# Altium PCB PMM_MSPC_22A.PcbDoc (part 4 of 5)
Units mm, origin at the board's own origin, x right, y up, seen from the top; angles counter-clockwise.
Board outline 86.91 x 61.9 mm, 4 copper layers (Top Layer, GroundPlane, MidLayer1, Bottom Layer); 159 components, 129 nets, 534 pads, 221 vias.
Unrouted connection lines stored in the file: 40.
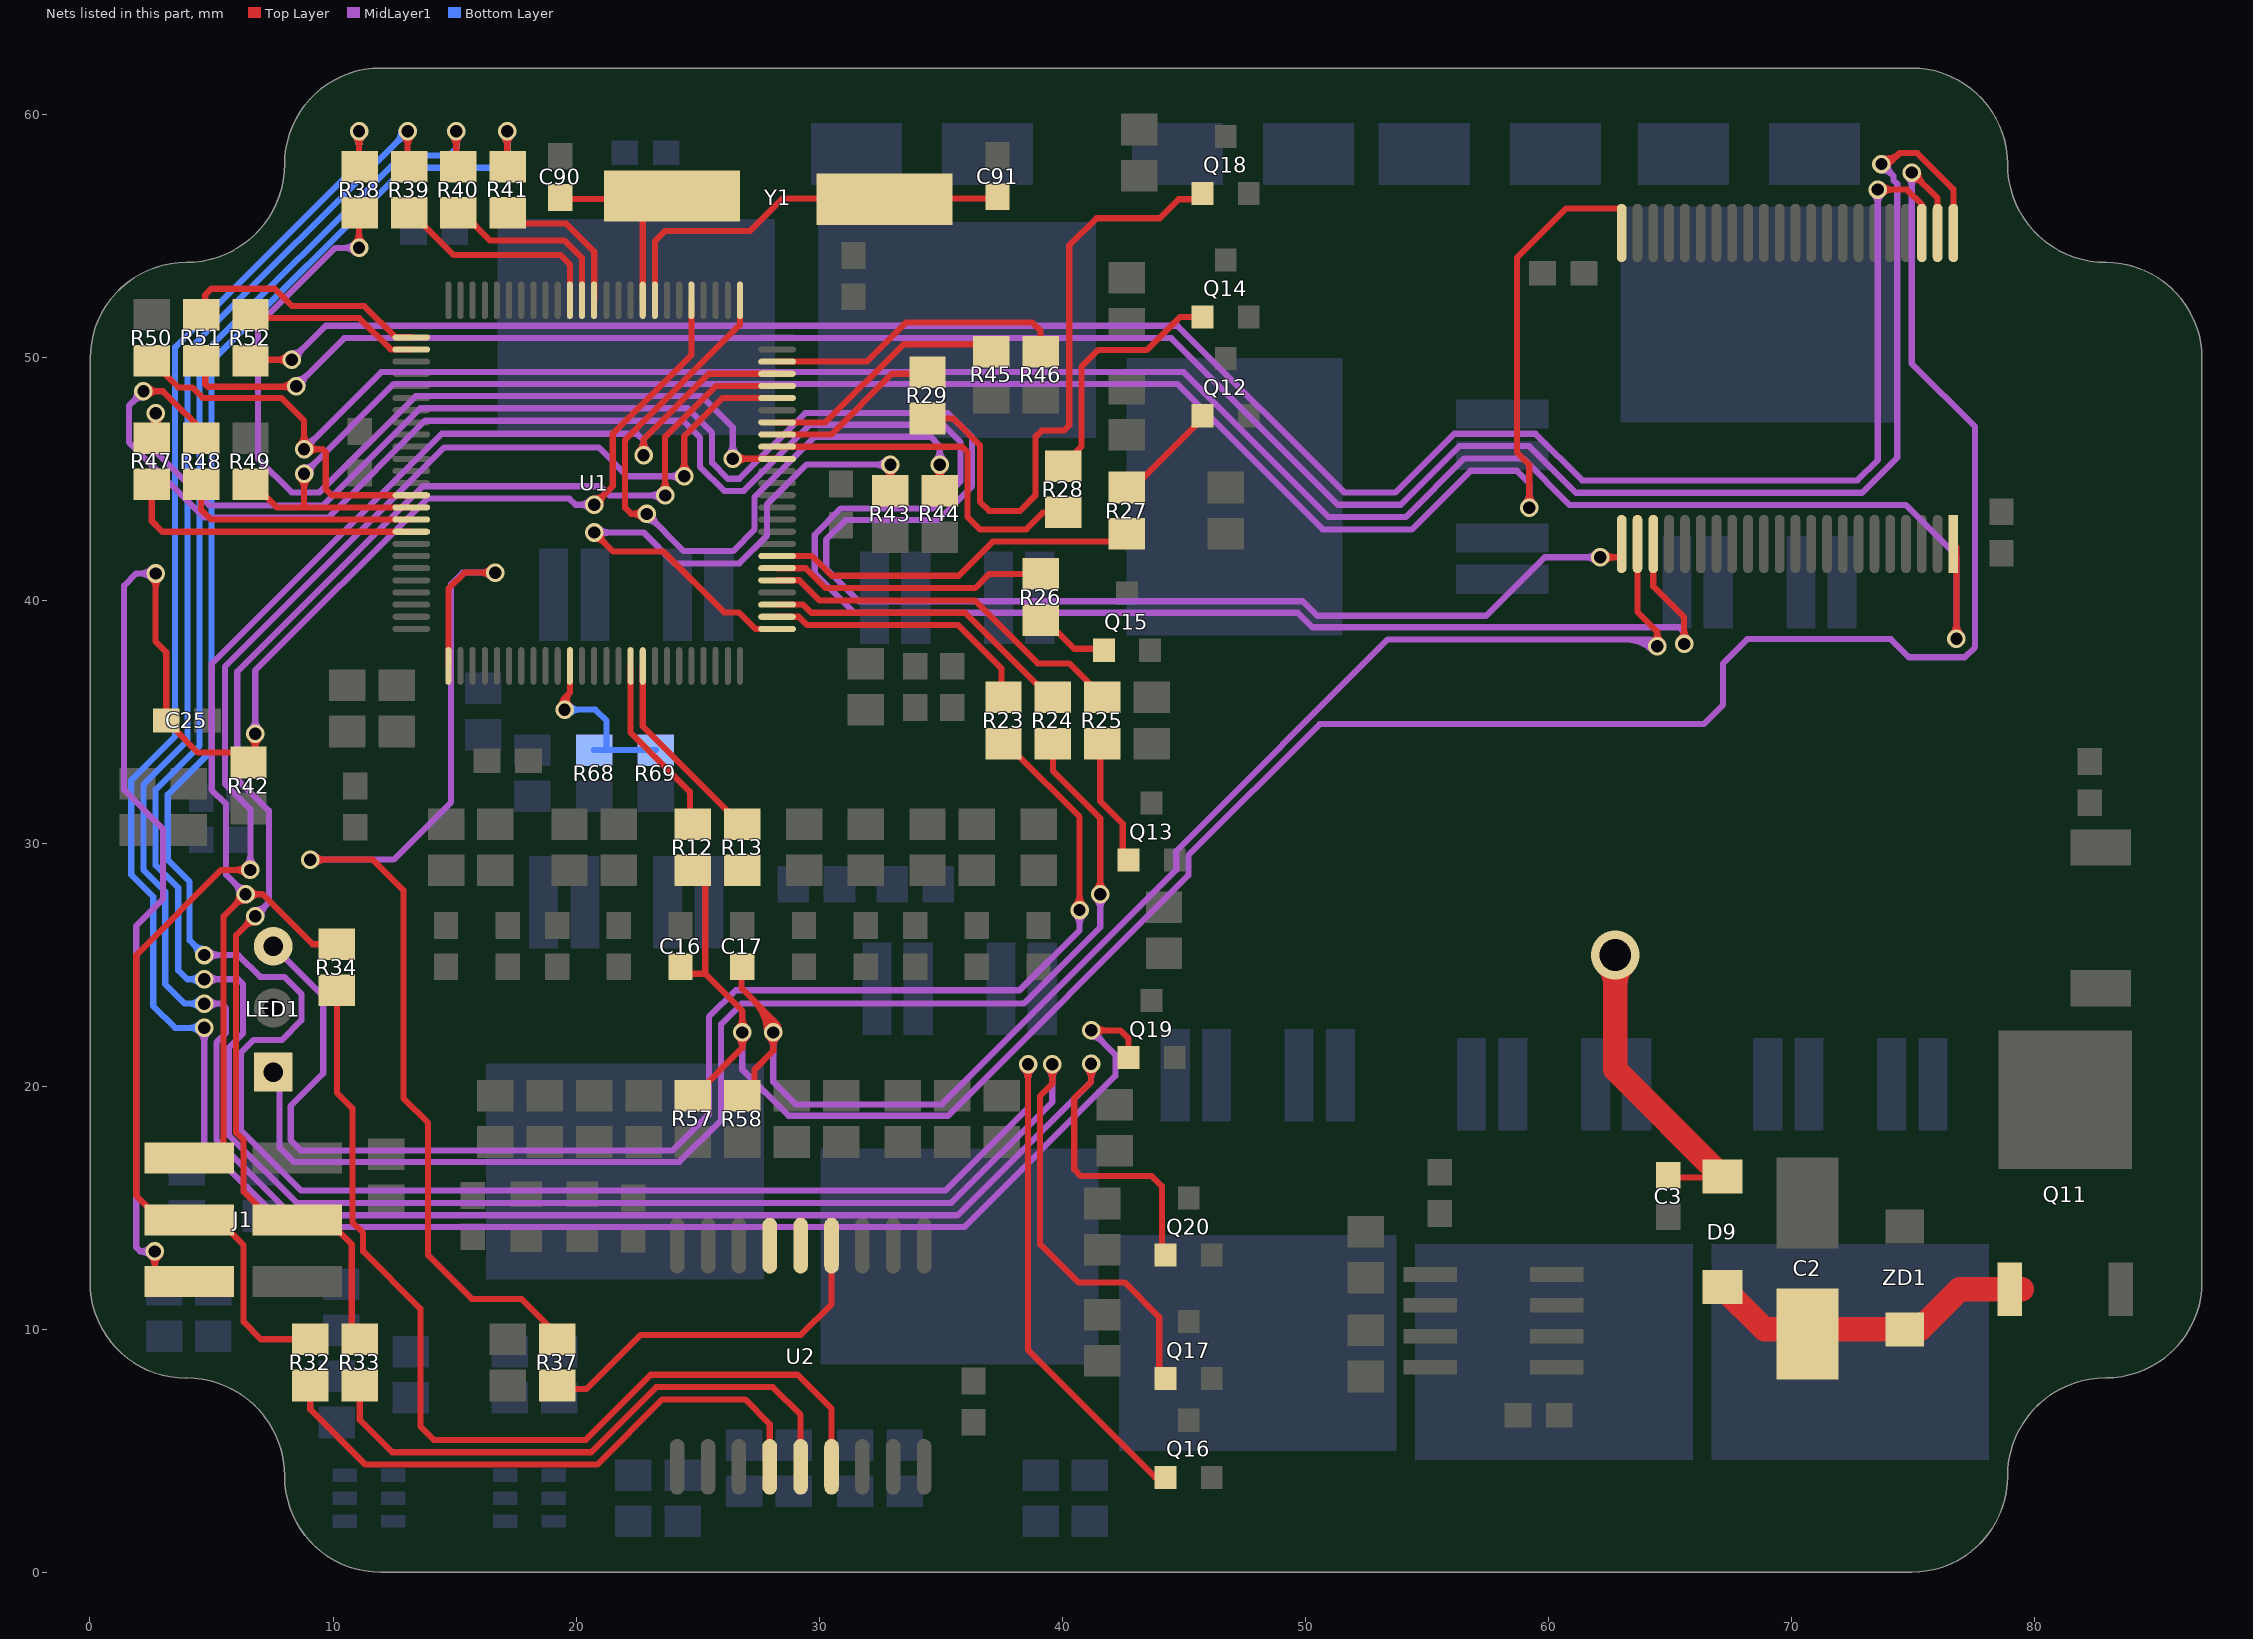
[diagram p6: the nets of this part, all layers, seen from the top]

## Via types
v1: diameter 0.762, hole 0.508, Top Layer to Bottom Layer, 138 vias
v2: diameter 2, hole 1.3, Top Layer to Bottom Layer, 26 vias
v3: diameter 1.27, hole 0.711, Top Layer to Bottom Layer, tented top, 23 vias
v4: diameter 0.762, hole 0.508, Top Layer to Bottom Layer, tented bottom, 21 vias
v5: diameter 1.27, hole 0.711, Top Layer to Bottom Layer, 7 vias
v6: diameter 0.762, hole 0.508, Top Layer to Bottom Layer, tented both sides, 5 vias
v7: diameter 2.6, hole 2.6, Top Layer to Bottom Layer, 1 vias

## Nets (pads, with @x,y where several pads share a name; then routed paths per layer and width w, separated by ;. In a path a pad name is that pad's centre, name@x,y a point inside that pad or via, vN(x,y) a via of type N, cw(c..) or ccw(c..) an arc to the next point about the centre after c; other vN are vias at no path point) (continued)
HL12_disable: pad.22 R47.1 R47.2 U1.67 | length 110.7
  Top Layer w0.254: v1@2.52,47.52 cw(c2.087,47.087) 2.7,47.087 cw(c3.313,47.087) v1@2.88,47.52 ; R47.1@2.54,44.77 2.54,43.26 2.981,42.819 U1.67@13.222,42.819 ; R47.2@2.7,46.8 v1(2.7,47.7) ; v1(62.149,41.771) pad.22@63.038,41.771 ; v1@62.329,41.591 cw(c62.762,41.158) 62.762,41.771 ; v1@62.329,41.591 cw(c62.762,41.158) 62.762,41.771 ; v1@62.329,41.591 cw(c62.762,41.158) 62.762,41.771 ; v1@62.329,41.591 cw(c62.762,41.158) 62.762,41.771 ; v1@62.329,41.591 cw(c62.762,41.158) 62.762,41.771 ; v1@62.329,41.951 ccw(c62.762,42.384) 62.762,41.771 ; v1@62.329,41.951 ccw(c62.762,42.384) 62.762,41.771 ; v1@62.329,41.951 ccw(c62.762,42.384) 62.762,41.771 ; v1@62.329,41.951 ccw(c62.762,42.384) 62.762,41.771 ; v1@62.329,41.951 ccw(c62.762,42.384) 62.762,41.771
  MidLayer1 w0.254: v1@2.52,47.52 cw(c2.087,47.087) 2.7,47.087 cw(c3.313,47.087) v1@2.88,47.52 ; v1(2.7,47.7) 2.7,46.1 4.9,43.9 9.6,43.9 13.6,47.9 24.6,47.9 25.6,46.9 25.6,45.648 26.248,45 26.726,45 29.426,47.7 35.301,47.7 36.3,46.701 36.3,44.7 34.9,43.3 31.1,43.3 30.3,42.5 30.3,41.3 31.639,39.961 49.9,39.961 50.503,39.359 57.451,39.359 59.863,41.771 v1(62.149,41.771) ; 61.536,41.771 cw(c61.536,41.158) v1@61.969,41.591 ; 61.536,41.771 ccw(c61.536,42.384) v1@61.969,41.951 ; 61.536,41.771 cw(c61.536,41.158) v1@61.969,41.591 ; 61.536,41.771 ccw(c61.536,42.384) v1@61.969,41.951 ; 61.536,41.771 cw(c61.536,41.158) v1@61.969,41.591 ; 61.536,41.771 ccw(c61.536,42.384) v1@61.969,41.951 ; 61.536,41.771 cw(c61.536,41.158) v1@61.969,41.591 ; 61.536,41.771 ccw(c61.536,42.384) v1@61.969,41.951 ; 61.536,41.771 cw(c61.536,41.158) v1@61.969,41.591 ; 61.536,41.771 ccw(c61.536,42.384) v1@61.969,41.951
HL12_enable: pad.20 R48.1 R48.2 U1.66 | length 112.5
  Top Layer w0.254: v1(2.2,48.6) 3,48.6 R48.2@4.9,46.7 ; v1@2.38,48.42 cw(c2.813,47.987) 2.813,48.6 cw(c2.813,49.213) v1@2.38,48.78 ; R48.1@4.572,44.77 4.572,43.728 4.981,43.319 U1.66@13.222,43.319 ; pad.20@64.33,42.314 64.33,40.57 65.6,39.3 v6(65.6,38.2) ; v6@65.42,38.38 ccw(c64.987,38.813) 65.6,38.813 ccw(c66.213,38.813) v6@65.78,38.38
  MidLayer1 w0.254: v1@1.946,48.6 cw(c1.333,48.6) 1.766,48.166 cw(c2.2,47.733) v1@2.2,48.346 ; v1(2.2,48.6) 1.6,48 1.6,46.496 4.696,43.4 9.8,43.4 13.785,47.385 24.415,47.385 25.1,46.7 25.1,45.5 26.1,44.5 26.9,44.5 29.624,47.224 35.104,47.224 35.824,46.504 35.824,44.897 34.703,43.776 30.903,43.776 29.824,42.697 29.824,41.103 31.441,39.485 49.703,39.485 50.303,38.885 65.415,38.885 65.6,38.7 ; v6@65.45,38.405 ccw(c65.235,38.7) 65.6,38.7 ; 65.451,38.849 cw(c65.009,38.406) v6(65.6,38.2) 65.6,38.7 ; v6@65.75,38.405 cw(c65.965,38.7) 65.6,38.7
HL12_feedback: C17.1 pad.21 R13.1 R13.2 R58.1 U1.92 | length 96.7
  Top Layer w0.254: U1.92@22.747,37.294 22.747,34.818 R13.1@26.589,30.976 ; C17.1@26.811,25.035 26.811,24.023 28.113,22.721 ; R58.1@27.351,19.546 27.351,20.689 28.113,21.451 28.113,22.721 ; pad.21@63.68,42.314 63.68,39.52 64.5,38.7 ; v6@64.323,38.282 ccw(c63.918,38.7) 64.5,38.7 ; v6(64.5,38.1) 64.5,38.7 ; v6@64.677,38.282 cw(c65.082,38.7) 64.5,38.7 ; 27.32,23.514 cw(c26.019,22.213) v1@27.859,22.213 ; 27.32,23.514 cw(c26.019,22.213) v1@27.859,22.213 ; 27.32,23.514 cw(c26.019,22.213) v1@27.859,22.213 ; 27.32,23.514 cw(c26.019,22.213) v1@27.859,22.213 ; 27.32,23.514 cw(c26.019,22.213) v1@27.859,22.213 ; 27.754,23.08 cw(c26.887,22.213) v1(28.113,22.213) ; 27.754,23.08 cw(c26.887,22.213) v1(28.113,22.213) ; 27.754,23.08 cw(c26.887,22.213) v1(28.113,22.213) ; 27.754,23.08 cw(c26.887,22.213) v1(28.113,22.213) ; 27.754,23.08 cw(c26.887,22.213) v1(28.113,22.213) ; v1@27.933,22.033 cw(c27.5,21.6) 28.113,21.6 ; v1@27.933,22.033 cw(c27.5,21.6) 28.113,21.6 ; v1@27.933,22.033 cw(c27.5,21.6) 28.113,21.6 ; v1@27.933,22.033 cw(c27.5,21.6) 28.113,21.6 ; v1@27.933,22.033 cw(c27.5,21.6) 28.113,21.6 ; v1@27.961,22.416 ccw(c27.732,22.721) 28.113,22.721 ; v1@27.961,22.416 ccw(c27.732,22.721) 28.113,22.721 ; v1@27.961,22.416 ccw(c27.732,22.721) 28.113,22.721 ; v1@27.961,22.416 ccw(c27.732,22.721) 28.113,22.721 ; v1@27.961,22.416 ccw(c27.732,22.721) 28.113,22.721 ; 28.113,21.6 cw(c28.726,21.6) v1@28.293,22.033 ; 28.113,21.6 cw(c28.726,21.6) v1@28.293,22.033 ; 28.113,21.6 cw(c28.726,21.6) v1@28.293,22.033 ; 28.113,21.6 cw(c28.726,21.6) v1@28.293,22.033 ; 28.113,21.6 cw(c28.726,21.6) v1@28.293,22.033 ; 28.113,22.721 ccw(c28.494,22.721) v1@28.265,22.416 ; 28.113,22.721 ccw(c28.494,22.721) v1@28.265,22.416 ; 28.113,22.721 ccw(c28.494,22.721) v1@28.265,22.416 ; 28.113,22.721 ccw(c28.494,22.721) v1@28.265,22.416 ; 28.113,22.721 ccw(c28.494,22.721) v1@28.265,22.416 ; 28.187,22.647 cw(c27.754,22.213) v1@28.367,22.213 ; 28.187,22.647 cw(c27.754,22.213) v1@28.367,22.213 ; 28.187,22.647 cw(c27.754,22.213) v1@28.367,22.213 ; 28.187,22.647 cw(c27.754,22.213) v1@28.367,22.213 ; 28.187,22.647 cw(c27.754,22.213) v1@28.367,22.213
  MidLayer1 w0.254: v1(28.113,22.213) 28.113,20.181 29.042,19.252 35.052,19.252 44.7,28.9 44.7,29.674 53.411,38.385 64.215,38.385 v6(64.5,38.1) ccw(c63.812,37.412) 63.812,38.385 ; 63.199,38.385 cw(c63.199,36.799) v6@64.32,37.92 ; v1@27.933,22.033 cw(c27.5,21.6) 28.113,21.6 ; v1@27.933,22.033 cw(c27.5,21.6) 28.113,21.6 ; v1@27.933,22.033 cw(c27.5,21.6) 28.113,21.6 ; v1@27.933,22.033 cw(c27.5,21.6) 28.113,21.6 ; v1@27.933,22.033 cw(c27.5,21.6) 28.113,21.6 ; 28.113,21.6 cw(c28.726,21.6) v1@28.293,22.033 ; 28.113,21.6 cw(c28.726,21.6) v1@28.293,22.033 ; 28.113,21.6 cw(c28.726,21.6) v1@28.293,22.033 ; 28.113,21.6 cw(c28.726,21.6) v1@28.293,22.033 ; 28.113,21.6 cw(c28.726,21.6) v1@28.293,22.033
HL12_status: pad.23 R49.1 U1.65 | length 99.7
  Top Layer w0.254: R49.1@6.8,44.7 7.681,43.819 U1.65@13.222,43.819 ; 8.809,43.819 v1(8.809,45.2) ; v4(59.228,43.803) 59.228,45.581 58.72,46.089 58.72,54.09 60.752,56.122 pad.23@63.038,56.122 ; v1@8.629,45.02 cw(c8.196,44.587) 8.809,44.587 ; v1@8.629,45.02 cw(c8.196,44.587) 8.809,44.587 ; v1@8.629,45.02 cw(c8.196,44.587) 8.809,44.587 ; v1@8.629,45.02 cw(c8.196,44.587) 8.809,44.587 ; v1@8.629,45.02 cw(c8.196,44.587) 8.809,44.587 ; 8.809,44.587 cw(c9.422,44.587) v1@8.989,45.02 ; 8.809,44.587 cw(c9.422,44.587) v1@8.989,45.02 ; 8.809,44.587 cw(c9.422,44.587) v1@8.989,45.02 ; 8.809,44.587 cw(c9.422,44.587) v1@8.989,45.02 ; 8.809,44.587 cw(c9.422,44.587) v1@8.989,45.02 ; v4@59.048,43.983 ccw(c58.615,44.416) 59.228,44.416 ; v4@59.048,43.983 ccw(c58.615,44.416) 59.228,44.416 ; v4@59.048,43.983 ccw(c58.615,44.416) 59.228,44.416 ; v4@59.048,43.983 ccw(c58.615,44.416) 59.228,44.416 ; v4@59.048,43.983 ccw(c58.615,44.416) 59.228,44.416 ; 59.228,44.416 ccw(c59.841,44.416) v4@59.408,43.983 ; 59.228,44.416 ccw(c59.841,44.416) v4@59.408,43.983 ; 59.228,44.416 ccw(c59.841,44.416) v4@59.408,43.983 ; 59.228,44.416 ccw(c59.841,44.416) v4@59.408,43.983 ; 59.228,44.416 ccw(c59.841,44.416) v4@59.408,43.983
  MidLayer1 w0.254: v1(8.809,45.2) 12.509,48.9 44.733,48.9 50.719,42.914 54.402,42.914 56.815,45.327 58.72,45.327 59.228,44.819 v4(59.228,43.803) ; v1@8.809,45.454 ccw(c8.809,46.067) 9.243,45.634 ; v1@8.809,45.454 ccw(c8.809,46.067) 9.243,45.634 ; v1@8.809,45.454 ccw(c8.809,46.067) 9.243,45.634 ; v1@8.809,45.454 ccw(c8.809,46.067) 9.243,45.634 ; v1@8.809,45.454 ccw(c8.809,46.067) 9.243,45.634 ; v1@9.063,45.2 cw(c9.676,45.2) 9.243,45.634 ; v1@9.063,45.2 cw(c9.676,45.2) 9.243,45.634 ; v1@9.063,45.2 cw(c9.676,45.2) 9.243,45.634 ; v1@9.063,45.2 cw(c9.676,45.2) 9.243,45.634 ; v1@9.063,45.2 cw(c9.676,45.2) 9.243,45.634 ; v4@59.048,43.983 ccw(c58.615,44.416) 59.228,44.416 ; v4@59.048,43.983 ccw(c58.615,44.416) 59.228,44.416 ; v4@59.048,43.983 ccw(c58.615,44.416) 59.228,44.416 ; v4@59.048,43.983 ccw(c58.615,44.416) 59.228,44.416 ; v4@59.048,43.983 ccw(c58.615,44.416) 59.228,44.416 ; 59.228,44.416 ccw(c59.841,44.416) v4@59.408,43.983 ; 59.228,44.416 ccw(c59.841,44.416) v4@59.408,43.983 ; 59.228,44.416 ccw(c59.841,44.416) v4@59.408,43.983 ; 59.228,44.416 ccw(c59.841,44.416) v4@59.408,43.983 ; 59.228,44.416 ccw(c59.841,44.416) v4@59.408,43.983
HL34_disable: pad.44 R51.1 R51.2 U1.51 | length 119.3
  Top Layer w0.254: R51.1@4.745,49.711 4.745,48.883 4.843,48.785 v1@8.457,48.785 ; R51.2@4.745,51.611 4.745,52.566 4.999,52.82 7.602,52.82 8.317,52.106 11.294,52.106 12.581,50.819 U1.51@13.222,50.819 ; 7.808,48.785 ccw(c7.808,49.484) v1@8.302,48.99 ; 7.929,48.785 cw(c7.929,48.257) v1@8.302,48.63 ; v1@73.752,57.923 cw(c74.17,57.518) 74.17,58.1 ; pad.44@76.68,55.114 76.68,56.916 75.196,58.4 74.47,58.4 ; v1(73.72,57.95) ccw(c73.82,58.397) 74.143,58.073 ; v1(73.72,57.95) ccw(c73.82,58.397) 74.143,58.073 ; v1(73.72,57.95) ccw(c73.82,58.397) 74.143,58.073 ; v1(73.72,57.95) ccw(c73.82,58.397) 74.143,58.073 ; v1(73.72,57.95) 74.17,58.1 ; v1@73.775,58.198 ccw(c73.939,58.931) 74.47,58.4 ; v1@73.775,58.198 ccw(c73.939,58.931) 74.47,58.4 ; v1@73.775,58.198 ccw(c73.939,58.931) 74.47,58.4 ; v1@73.775,58.198 ccw(c73.939,58.931) 74.47,58.4 ; v1@73.876,58.15 ccw(c74.07,58.4) 74.17,58.1 ; v1@73.876,58.15 ccw(c74.07,58.4) 74.17,58.1 ; v1@73.876,58.15 ccw(c74.07,58.4) 74.17,58.1 ; v1@73.876,58.15 ccw(c74.07,58.4) 74.17,58.1 ; v1@73.965,57.883 cw(c74.27,57.8) 74.17,58.1 ; v1@73.965,57.883 cw(c74.27,57.8) 74.17,58.1 ; v1@73.965,57.883 cw(c74.27,57.8) 74.17,58.1 ; v1@73.965,57.883 cw(c74.27,57.8) 74.17,58.1 ; 74.17,58.1 74.47,58.4
  MidLayer1 w0.254: v1(8.482,48.81) 10.46,50.788 44.496,50.788 51.354,43.93 53.938,43.93 56.351,46.343 59.228,46.343 61.147,44.424 72.924,44.424 74.37,45.87 74.37,57.13 74.211,57.289 74.211,57.459 v1(73.72,57.95) ; v1@8.482,49.064 ccw(c8.482,49.677) 8.916,49.244 ccw(c9.349,48.81) v1@8.736,48.81 ; v1@73.57,57.846 cw(c73.57,57.233) 74.004,57.666 cw(c74.437,58.1) v1@73.824,58.1 ; v1@73.72,57.696 cw(c73.72,57.083) 74.154,57.516 ; v1@73.72,57.696 cw(c73.72,57.083) 74.154,57.516 ; v1@73.72,57.696 cw(c73.72,57.083) 74.154,57.516 ; v1@73.72,57.696 cw(c73.72,57.083) 74.154,57.516 ; v1@73.974,57.95 ccw(c74.587,57.95) 74.154,57.516 ; v1@73.974,57.95 ccw(c74.587,57.95) 74.154,57.516 ; v1@73.974,57.95 ccw(c74.587,57.95) 74.154,57.516 ; v1@73.974,57.95 ccw(c74.587,57.95) 74.154,57.516
HL34_enable: pad.42 R52.1 R52.2 U1.52 | length 112.6
  Top Layer w0.254: R52.2@6.904,51.611 11.085,51.611 12.377,50.319 U1.52@13.222,50.319 ; R52.1@7.031,49.899 v1(8.301,49.899) ; v1(73.57,56.9) 74.77,56.9 75.38,56.29 pad.42@75.38,55.114 ; 7.688,49.899 cw(c7.688,49.286) v1@8.121,49.719 ; 7.688,49.899 ccw(c7.688,50.512) v1@8.121,50.079 ; 7.688,49.899 cw(c7.688,49.286) v1@8.121,49.719 ; 7.688,49.899 ccw(c7.688,50.512) v1@8.121,50.079 ; 7.688,49.899 cw(c7.688,49.286) v1@8.121,49.719 ; 7.688,49.899 ccw(c7.688,50.512) v1@8.121,50.079 ; 7.688,49.899 cw(c7.688,49.286) v1@8.121,49.719 ; 7.688,49.899 ccw(c7.688,50.512) v1@8.121,50.079 ; 7.688,49.899 cw(c7.688,49.286) v1@8.121,49.719 ; 7.688,49.899 ccw(c7.688,50.512) v1@8.121,50.079 ; v1@73.75,56.72 cw(c74.183,56.287) 74.183,56.9 ; v1@73.75,56.72 cw(c74.183,56.287) 74.183,56.9 ; v1@73.75,56.72 cw(c74.183,56.287) 74.183,56.9 ; v1@73.75,56.72 cw(c74.183,56.287) 74.183,56.9 ; v1@73.75,56.72 cw(c74.183,56.287) 74.183,56.9 ; v1@73.75,57.08 ccw(c74.183,57.513) 74.183,56.9 ; v1@73.75,57.08 ccw(c74.183,57.513) 74.183,56.9 ; v1@73.75,57.08 ccw(c74.183,57.513) 74.183,56.9 ; v1@73.75,57.08 ccw(c74.183,57.513) 74.183,56.9 ; v1@73.75,57.08 ccw(c74.183,57.513) 74.183,56.9
  MidLayer1 w0.254: v1(8.301,49.899) 9.698,51.296 44.75,51.296 51.608,44.438 53.727,44.438 56.14,46.851 59.482,46.851 61.401,44.932 72.732,44.932 73.57,45.77 v1(73.57,56.9) ; v1@8.301,50.153 ccw(c8.301,50.766) 8.735,50.333 ; v1@8.301,50.153 ccw(c8.301,50.766) 8.735,50.333 ; v1@8.301,50.153 ccw(c8.301,50.766) 8.735,50.333 ; v1@8.301,50.153 ccw(c8.301,50.766) 8.735,50.333 ; v1@8.301,50.153 ccw(c8.301,50.766) 8.735,50.333 ; v1@8.555,49.899 cw(c9.168,49.899) 8.735,50.333 ; v1@8.555,49.899 cw(c9.168,49.899) 8.735,50.333 ; v1@8.555,49.899 cw(c9.168,49.899) 8.735,50.333 ; v1@8.555,49.899 cw(c9.168,49.899) 8.735,50.333 ; v1@8.555,49.899 cw(c9.168,49.899) 8.735,50.333 ; v1@73.39,56.72 cw(c72.957,56.287) 73.57,56.287 ; v1@73.39,56.72 cw(c72.957,56.287) 73.57,56.287 ; v1@73.39,56.72 cw(c72.957,56.287) 73.57,56.287 ; v1@73.39,56.72 cw(c72.957,56.287) 73.57,56.287 ; v1@73.39,56.72 cw(c72.957,56.287) 73.57,56.287 ; 73.57,56.287 cw(c74.183,56.287) v1@73.75,56.72 ; 73.57,56.287 cw(c74.183,56.287) v1@73.75,56.72 ; 73.57,56.287 cw(c74.183,56.287) v1@73.75,56.72 ; 73.57,56.287 cw(c74.183,56.287) v1@73.75,56.72 ; 73.57,56.287 cw(c74.183,56.287) v1@73.75,56.72
HL34_feedback: C16.1 pad.43 R12.1 R12.2 R57.1 U1.91 | length 129.3
  Top Layer w0.254: U1.91@22.247,37.294 22.247,34.556 24.684,32.119 24.684,31.484 ; C16.1@24.303,24.626 25.319,24.626 ; R57.1@24.938,19.673 26.843,21.578 26.843,23.102 25.319,24.626 ; R12.2@25.319,28.944 25.319,24.626 ; v1(74.97,57.6) 76.03,56.54 pad.43@76.03,55.114 ; v1@26.663,22.033 cw(c26.23,21.6) 26.843,21.6 ; v1@26.663,22.033 cw(c26.23,21.6) 26.843,21.6 ; v1@26.663,22.033 cw(c26.23,21.6) 26.843,21.6 ; v1@26.663,22.033 cw(c26.23,21.6) 26.843,21.6 ; v1@26.663,22.033 cw(c26.23,21.6) 26.843,21.6 ; v1@26.663,22.393 ccw(c26.23,22.826) 26.843,22.826 ; v1@26.663,22.393 ccw(c26.23,22.826) 26.843,22.826 ; v1@26.663,22.393 ccw(c26.23,22.826) 26.843,22.826 ; v1@26.663,22.393 ccw(c26.23,22.826) 26.843,22.826 ; v1@26.663,22.393 ccw(c26.23,22.826) 26.843,22.826 ; 26.843,21.6 cw(c27.456,21.6) v1@27.023,22.033 ; 26.843,21.6 cw(c27.456,21.6) v1@27.023,22.033 ; 26.843,21.6 cw(c27.456,21.6) v1@27.023,22.033 ; 26.843,21.6 cw(c27.456,21.6) v1@27.023,22.033 ; 26.843,21.6 cw(c27.456,21.6) v1@27.023,22.033 ; 26.843,22.826 ccw(c27.456,22.826) v1@27.023,22.393 ; 26.843,22.826 ccw(c27.456,22.826) v1@27.023,22.393 ; 26.843,22.826 ccw(c27.456,22.826) v1@27.023,22.393 ; 26.843,22.826 ccw(c27.456,22.826) v1@27.023,22.393 ; 26.843,22.826 ccw(c27.456,22.826) v1@27.023,22.393 ; v1@74.97,57.346 cw(c74.97,56.733) 75.404,57.166 ; v1@74.97,57.346 cw(c74.97,56.733) 75.404,57.166 ; v1@74.97,57.346 cw(c74.97,56.733) 75.404,57.166 ; v1@74.97,57.346 cw(c74.97,56.733) 75.404,57.166 ; v1@74.97,57.346 cw(c74.97,56.733) 75.404,57.166 ; v1@75.224,57.6 ccw(c75.837,57.6) 75.404,57.166 ; v1@75.224,57.6 ccw(c75.837,57.6) 75.404,57.166 ; v1@75.224,57.6 ccw(c75.837,57.6) 75.404,57.166 ; v1@75.224,57.6 ccw(c75.837,57.6) 75.404,57.166 ; v1@75.224,57.6 ccw(c75.837,57.6) 75.404,57.166
  MidLayer1 w0.254: v1(26.843,22.213) 26.843,20.689 28.748,18.784 35.31,18.784 45.2,28.674 45.2,29.5 50.6,34.9 66.4,34.9 67.2,35.7 67.2,37.4 68.2,38.4 74.1,38.4 74.85,37.65 77.15,37.65 77.57,38.07 77.57,47.13 74.97,49.73 v1(74.97,57.6) ; v1@26.663,22.033 cw(c26.23,21.6) 26.843,21.6 ; v1@26.663,22.033 cw(c26.23,21.6) 26.843,21.6 ; v1@26.663,22.033 cw(c26.23,21.6) 26.843,21.6 ; v1@26.663,22.033 cw(c26.23,21.6) 26.843,21.6 ; v1@26.663,22.033 cw(c26.23,21.6) 26.843,21.6 ; 26.843,21.6 cw(c27.456,21.6) v1@27.023,22.033 ; 26.843,21.6 cw(c27.456,21.6) v1@27.023,22.033 ; 26.843,21.6 cw(c27.456,21.6) v1@27.023,22.033 ; 26.843,21.6 cw(c27.456,21.6) v1@27.023,22.033 ; 26.843,21.6 cw(c27.456,21.6) v1@27.023,22.033 ; v1@74.79,57.42 cw(c74.357,56.987) 74.97,56.987 ; v1@74.79,57.42 cw(c74.357,56.987) 74.97,56.987 ; v1@74.79,57.42 cw(c74.357,56.987) 74.97,56.987 ; v1@74.79,57.42 cw(c74.357,56.987) 74.97,56.987 ; v1@74.79,57.42 cw(c74.357,56.987) 74.97,56.987 ; 74.97,56.987 cw(c75.583,56.987) v1@75.15,57.42 ; 74.97,56.987 cw(c75.583,56.987) v1@75.15,57.42 ; 74.97,56.987 cw(c75.583,56.987) v1@75.15,57.42 ; 74.97,56.987 cw(c75.583,56.987) v1@75.15,57.42 ; 74.97,56.987 cw(c75.583,56.987) v1@75.15,57.42
HL34_status: pad.1 R50.1 U1.64 | length 114.9
  Top Layer w0.254: R50.1@2.54,49.85 3.63,48.76 4.2,48.76 4.635,48.325 7.871,48.325 8.809,47.387 v1(8.809,46.216) ; v1@8.629,46.396 ccw(c8.196,46.829) 8.809,46.829 ccw(c9.422,46.829) v1@8.989,46.396 ; 9.571,46.216 9.698,46.089 9.698,44.565 9.944,44.319 U1.64@13.222,44.319 ; pad.1@76.68,42.314 76.807,42.187 v1(76.807,38.416) ; v1@8.989,46.036 cw(c9.422,45.603) 9.422,46.216 ; v1@8.989,46.036 cw(c9.422,45.603) 9.422,46.216 ; v1@8.989,46.036 cw(c9.422,45.603) 9.422,46.216 ; v1@8.989,46.036 cw(c9.422,45.603) 9.422,46.216 ; v1@8.989,46.396 ccw(c9.422,46.829) 9.422,46.216 ; v1@8.989,46.396 ccw(c9.422,46.829) 9.422,46.216 ; v1@8.989,46.396 ccw(c9.422,46.829) 9.422,46.216 ; v1@8.989,46.396 ccw(c9.422,46.829) 9.422,46.216 ; v1@76.627,38.596 ccw(c76.193,39.03) 76.807,39.03 ; v1@76.627,38.596 ccw(c76.193,39.03) 76.807,39.03 ; v1@76.627,38.596 ccw(c76.193,39.03) 76.807,39.03 ; v1@76.627,38.596 ccw(c76.193,39.03) 76.807,39.03 ; v1@76.627,38.596 ccw(c76.193,39.03) 76.807,39.03 ; 76.807,39.03 ccw(c77.42,39.03) v1@76.986,38.596 ; 76.807,39.03 ccw(c77.42,39.03) v1@76.986,38.596 ; 76.807,39.03 ccw(c77.42,39.03) v1@76.986,38.596 ; 76.807,39.03 ccw(c77.42,39.03) v1@76.986,38.596 ; 76.807,39.03 ccw(c77.42,39.03) v1@76.986,38.596
  MidLayer1 w0.254: v1(8.809,46.216) 11.978,49.385 45.01,49.385 50.973,43.422 54.148,43.422 56.561,45.835 58.974,45.835 60.893,43.916 74.736,43.916 76.807,41.845 v1(76.807,38.416) ; v1@8.809,46.47 ccw(c8.809,47.083) 9.243,46.65 ; v1@8.809,46.47 ccw(c8.809,47.083) 9.243,46.65 ; v1@8.809,46.47 ccw(c8.809,47.083) 9.243,46.65 ; v1@8.809,46.47 ccw(c8.809,47.083) 9.243,46.65 ; v1@8.809,46.47 ccw(c8.809,47.083) 9.243,46.65 ; v1@9.063,46.216 cw(c9.676,46.216) 9.243,46.65 ; v1@9.063,46.216 cw(c9.676,46.216) 9.243,46.65 ; v1@9.063,46.216 cw(c9.676,46.216) 9.243,46.65 ; v1@9.063,46.216 cw(c9.676,46.216) 9.243,46.65 ; v1@9.063,46.216 cw(c9.676,46.216) 9.243,46.65 ; v1@76.627,38.596 ccw(c76.193,39.03) 76.807,39.03 ; v1@76.627,38.596 ccw(c76.193,39.03) 76.807,39.03 ; v1@76.627,38.596 ccw(c76.193,39.03) 76.807,39.03 ; v1@76.627,38.596 ccw(c76.193,39.03) 76.807,39.03 ; v1@76.627,38.596 ccw(c76.193,39.03) 76.807,39.03 ; 76.807,39.03 ccw(c77.42,39.03) v1@76.986,38.596 ; 76.807,39.03 ccw(c77.42,39.03) v1@76.986,38.596 ; 76.807,39.03 ccw(c77.42,39.03) v1@76.986,38.596 ; 76.807,39.03 ccw(c77.42,39.03) v1@76.986,38.596 ; 76.807,39.03 ccw(c77.42,39.03) v1@76.986,38.596
IGN_SIG: C2.1 C3.2 D9.1 D9.2 Q11.1 ZD1.2 | length 28.5
  Top Layer w0.254: C3.2@65.07,16.244 D9.1@67.037,16.244
  Top Layer w1: v2@62.416,25.046 cw(c61.563,24.193) 62.77,24.193 cw(c63.977,24.193) v2@63.124,25.046 ; v2(62.77,25.4) 62.77,20.687 D9.1@67.175,16.282 ; D9.2@67.175,11.732 68.907,10 75.3,10 76.948,11.648 79.503,11.648
LEDamber: LED1.3 R23.1 R23.2 U1.2 | length 76.1
  Top Layer w0.254: U1.2@28.272,39.319 29.168,39.319 29.51,38.977 35.723,38.977 37.511,37.189 R23.2@37.511,36.371 ; R23.1@37.511,34.471 38.041,33.941 38.041,33.759 40.72,31.08 v1(40.72,27.25) ; v1@40.54,27.43 ccw(c40.107,27.863) 40.72,27.863 ; v1@40.54,27.43 ccw(c40.107,27.863) 40.72,27.863 ; v1@40.54,27.43 ccw(c40.107,27.863) 40.72,27.863 ; v1@40.54,27.43 ccw(c40.107,27.863) 40.72,27.863 ; v1@40.54,27.43 ccw(c40.107,27.863) 40.72,27.863 ; 40.72,27.863 ccw(c41.333,27.863) v1@40.9,27.43 ; 40.72,27.863 ccw(c41.333,27.863) v1@40.9,27.43 ; 40.72,27.863 ccw(c41.333,27.863) v1@40.9,27.43 ; 40.72,27.863 ccw(c41.333,27.863) v1@40.9,27.43 ; 40.72,27.863 ccw(c41.333,27.863) v1@40.9,27.43
  MidLayer1 w0.254: LED1.3@7.539,25.76 9.6,23.699 9.6,20.53 8.26,19.19 8.26,17.786 8.696,17.35 23.97,17.35 25.47,18.85 25.47,22.85 26.57,23.95 38.25,23.95 40.72,26.42 v1(40.72,27.25) ; v1@40.54,27.07 cw(c40.107,26.637) 40.72,26.637 ; v1@40.54,27.07 cw(c40.107,26.637) 40.72,26.637 ; v1@40.54,27.07 cw(c40.107,26.637) 40.72,26.637 ; 40.72,26.637 cw(c41.333,26.637) v1@40.9,27.07 ; 40.72,26.637 cw(c41.333,26.637) v1@40.9,27.07 ; 40.72,26.637 cw(c41.333,26.637) v1@40.9,27.07
LEDgreen: LED1.1 R24.1 R24.2 U1.3 | length 74.2
  Top Layer w0.254: U1.3@28.272,39.819 29.343,39.819 29.677,39.485 36.015,39.485 39.129,36.371 R24.2@39.543,36.371 ; R24.1@39.624,34.102 39.624,32.976 41.57,31.03 v1(41.57,27.9) ; v1@41.39,28.08 ccw(c40.957,28.513) 41.57,28.513 ; v1@41.39,28.08 ccw(c40.957,28.513) 41.57,28.513 ; v1@41.39,28.08 ccw(c40.957,28.513) 41.57,28.513 ; v1@41.39,28.08 ccw(c40.957,28.513) 41.57,28.513 ; v1@41.39,28.08 ccw(c40.957,28.513) 41.57,28.513 ; 41.57,28.513 ccw(c42.183,28.513) v1@41.75,28.08 ; 41.57,28.513 ccw(c42.183,28.513) v1@41.75,28.08 ; 41.57,28.513 ccw(c42.183,28.513) v1@41.75,28.08 ; 41.57,28.513 ccw(c42.183,28.513) v1@41.75,28.08 ; 41.57,28.513 ccw(c42.183,28.513) v1@41.75,28.08
  MidLayer1 w0.254: LED1.1@7.539,20.58 7.8,20.319 7.8,17.47 8.385,16.885 24.255,16.885 25.97,18.6 25.97,22.55 26.82,23.4 38.426,23.4 41.57,26.544 v1(41.57,27.9) ; v1@41.39,27.72 cw(c40.957,27.287) 41.57,27.287 ; v1@41.39,27.72 cw(c40.957,27.287) 41.57,27.287 ; v1@41.39,27.72 cw(c40.957,27.287) 41.57,27.287 ; v1@41.39,27.72 cw(c40.957,27.287) 41.57,27.287 ; v1@41.39,27.72 cw(c40.957,27.287) 41.57,27.287 ; 41.57,27.287 cw(c42.183,27.287) v1@41.75,27.72 ; 41.57,27.287 cw(c42.183,27.287) v1@41.75,27.72 ; 41.57,27.287 cw(c42.183,27.287) v1@41.75,27.72 ; 41.57,27.287 cw(c42.183,27.287) v1@41.75,27.72 ; 41.57,27.287 cw(c42.183,27.287) v1@41.75,27.72
MISO: J1.1 R34.1 R34.2 U1.22 U2.15 | length 108.7
  Top Layer w0.254: J1.1@5.5,17 5.5,27 v1(6.4,27.9) 7.1,27.9 9.158,25.842 R34.1@10.16,25.842 ; v1@6.146,27.9 cw(c5.533,27.9) 5.966,27.466 cw(c6.4,27.033) v1@6.4,27.646 ; v1@6.58,27.72 cw(c7.013,27.287) 7.013,27.9 cw(c7.013,28.513) v1@6.58,28.08 ; R34.2@10.16,23.942 10.16,19.74 10.8,19.1 10.8,14.4 11.238,13.962 11.238,13.212 13.6,10.85 13.6,6 14.151,5.449 20.398,5.449 23.077,8.128 29.117,8.128 30.514,6.731 U2.15@30.514,4.34 ; v4(22.779,45.962) 22.779,46.629 25.469,49.319 U1.22@28.272,49.319 ; v4@22.599,46.142 ccw(c22.166,46.575) 22.779,46.575 ; v4@22.599,46.142 ccw(c22.166,46.575) 22.779,46.575 ; v4@22.599,46.142 ccw(c22.166,46.575) 22.779,46.575 ; v4@22.599,46.142 ccw(c22.166,46.575) 22.779,46.575 ; v4@22.599,46.142 ccw(c22.166,46.575) 22.779,46.575 ; 22.779,46.575 ccw(c23.392,46.575) v4@22.959,46.142 ; 22.779,46.575 ccw(c23.392,46.575) v4@22.959,46.142 ; 22.779,46.575 ccw(c23.392,46.575) v4@22.959,46.142 ; 22.779,46.575 ccw(c23.392,46.575) v4@22.959,46.142 ; 22.779,46.575 ccw(c23.392,46.575) v4@22.959,46.142
  MidLayer1 w0.254: v1@6.146,27.9 ccw(c5.533,27.9) 5.966,28.334 ccw(c6.4,28.767) v1@6.4,28.154 ; v1(6.4,27.9) 5.6,28.7 5.6,31.596 5.011,32.185 5.011,37.385 14.477,46.851 22.503,46.851 22.779,46.575 ; v4(22.779,45.962) 22.779,46.575 ; v4@22.599,46.142 ccw(c22.166,46.575) 22.779,46.575 ; v4@22.599,46.142 ccw(c22.166,46.575) 22.779,46.575 ; v4@22.599,46.142 ccw(c22.166,46.575) 22.779,46.575 ; v4@22.599,46.142 ccw(c22.166,46.575) 22.779,46.575 ; v4@22.599,46.142 ccw(c22.166,46.575) 22.779,46.575 ; 22.779,46.575 ccw(c23.392,46.575) v4@22.959,46.142 ; 22.779,46.575 ccw(c23.392,46.575) v4@22.959,46.142 ; 22.779,46.575 ccw(c23.392,46.575) v4@22.959,46.142 ; 22.779,46.575 ccw(c23.392,46.575) v4@22.959,46.142 ; 22.779,46.575 ccw(c23.392,46.575) v4@22.959,46.142
MOSI: J1.4 R33.1 R33.2 U1.21 U2.14 | length 96.4
  Top Layer w0.254: v1@6.546,27 cw(c5.933,27) 6.366,26.566 cw(c6.8,26.133) v1@6.8,26.746 ; v1(6.8,27) 6.011,26.211 6.011,18.085 6.32,17.776 6.32,15.65 7.47,14.5 9.77,14.5 10.77,13.5 10.77,9.518 R33.1@10.627,9.375 ; R33.2@11.098,7.686 11.098,6.272 12.429,4.941 20.625,4.941 23.304,7.62 28.101,7.62 29.244,6.477 U2.14@29.244,4.34 ; v1(23.668,44.311) 23.668,46.724 25.763,48.819 U1.21@28.272,48.819 ; v1@23.488,44.491 ccw(c23.055,44.924) 23.668,44.924 ; v1@23.488,44.491 ccw(c23.055,44.924) 23.668,44.924 ; v1@23.488,44.491 ccw(c23.055,44.924) 23.668,44.924 ; v1@23.488,44.491 ccw(c23.055,44.924) 23.668,44.924 ; v1@23.488,44.491 ccw(c23.055,44.924) 23.668,44.924 ; 23.668,44.924 ccw(c24.281,44.924) v1@23.848,44.491 ; 23.668,44.924 ccw(c24.281,44.924) v1@23.848,44.491 ; 23.668,44.924 ccw(c24.281,44.924) v1@23.848,44.491 ; 23.668,44.924 ccw(c24.281,44.924) v1@23.848,44.491 ; 23.668,44.924 ccw(c24.281,44.924) v1@23.848,44.491
  MidLayer1 w0.254: v1(6.8,27) 7.364,27.564 7.364,31.336 6.061,32.639 6.061,37.061 13.692,44.692 21.001,44.692 21.382,44.311 v1(23.668,44.311) ; v1@6.8,27.254 ccw(c6.8,27.867) 7.234,27.434 ccw(c7.667,27) v1@7.054,27 ; 23.055,44.311 cw(c23.055,43.698) v1@23.488,44.131 ; 23.055,44.311 ccw(c23.055,44.924) v1@23.488,44.491 ; 23.055,44.311 cw(c23.055,43.698) v1@23.488,44.131 ; 23.055,44.311 ccw(c23.055,44.924) v1@23.488,44.491 ; 23.055,44.311 cw(c23.055,43.698) v1@23.488,44.131 ; 23.055,44.311 ccw(c23.055,44.924) v1@23.488,44.491 ; 23.055,44.311 cw(c23.055,43.698) v1@23.488,44.131 ; 23.055,44.311 ccw(c23.055,44.924) v1@23.488,44.491 ; 23.055,44.311 cw(c23.055,43.698) v1@23.488,44.131 ; 23.055,44.311 ccw(c23.055,44.924) v1@23.488,44.491
NewNet: 
PWM1: Q15.1 R26.1 R26.2 U1.6 | length 14.6
  Top Layer w0.254: U1.6@28.272,41.319 29.454,41.319 30.272,40.501 36.421,40.501 37.002,41.082 R26.2@38.608,41.082 ; R26.1@38.608,39.182 38.757,39.033 39.259,39.241 40.5,38 Q15.1@41.722,38
PWM2: Q12.1 R27.1 R27.2 U1.7 | length 19.7
  Top Layer w0.254: U1.7@28.272,41.819 29.716,41.819 30.526,41.009 35.749,41.009 37.15,42.41 R27.1@42.7,42.41 ; R27.2@42.672,44.638 42.938,44.638 Q12.1@45.84,47.54
PWM3: Q14.1 R28.1 R28.2 U1.16 | length 25.5
  Top Layer w0.254: U1.16@28.272,46.319 35.884,46.319 36.114,46.089 36.114,43.422 36.622,42.914 38.527,42.914 39.228,43.615 R28.1@40.051,43.615 ; R28.2@40.305,45.2 40.305,45.825 40.8,46.32 40.8,49.6 41.5,50.3 43.5,50.3 44.857,51.657 Q14.1@45.786,51.657
PWM4: Q18.1 R29.1 R29.2 U1.17 | length 32.8
  Top Layer w0.254: U1.17@28.272,46.819 30.494,46.819 32.996,49.321 R29.2@34.52,49.321 ; R29.1@34.463,47.479 35.521,47.479 36.622,46.378 36.622,44.057 37.003,43.676 38.273,43.676 38.908,44.311 38.908,46.724 39.162,46.978 40.078,46.978 40.3,47.2 40.3,54.6 41.421,55.721 44.021,55.721 44.8,56.5 Q18.1@46,56.5
PWM5: Q16.1 R41.1 R41.2 U1.38 | length 127.6
  Top Layer w0.254: v1@16.99,59.12 cw(c16.557,58.687) 17.17,58.687 cw(c17.783,58.687) v1@17.35,59.12 ; R41.2@17.17,57.87 v1(17.17,59.3) ; R41.1@17.47,55.5 19.591,55.5 20.747,54.344 U1.38@20.747,52.344 ; v1(38.6,20.9) 38.6,9.142 43.837,3.905 Q16.1@44.262,3.905 ; v1@38.42,20.72 cw(c37.987,20.287) 38.6,20.287 ; v1@38.42,20.72 cw(c37.987,20.287) 38.6,20.287 ; v1@38.42,20.72 cw(c37.987,20.287) 38.6,20.287 ; 38.6,20.287 cw(c39.213,20.287) v1@38.78,20.72 ; 38.6,20.287 cw(c39.213,20.287) v1@38.78,20.72 ; 38.6,20.287 cw(c39.213,20.287) v1@38.78,20.72
  MidLayer1 w0.254: v1(4.7,25.4) 6.1,25.4 7,24.5 8,24.5 8.7,23.8 8.7,22.713 7.887,21.9 6.726,21.9 6.2,21.374 6.2,18.196 8.692,15.704 35.193,15.704 38.6,19.111 v1(38.6,20.9) ; v1@4.88,25.22 cw(c5.313,24.787) 5.313,25.4 cw(c5.313,26.013) v1@4.88,25.58 ; v1@38.42,20.72 cw(c37.987,20.287) 38.6,20.287 ; v1@38.42,20.72 cw(c37.987,20.287) 38.6,20.287 ; v1@38.42,20.72 cw(c37.987,20.287) 38.6,20.287 ; 38.6,20.287 cw(c39.213,20.287) v1@38.78,20.72 ; 38.6,20.287 cw(c39.213,20.287) v1@38.78,20.72 ; 38.6,20.287 cw(c39.213,20.287) v1@38.78,20.72
  Bottom Layer w0.254: v1@4.446,25.4 ccw(c3.833,25.4) 4.266,25.834 ccw(c4.7,26.267) v1@4.7,25.654 ; v1(4.7,25.4) 4.1,26 4.1,28.413 3.2,29.313 3.2,32 5,33.8 5,49.83 12.97,57.8 16.87,57.8 17.17,58.1 v1(17.17,59.3) ; v1@16.99,59.12 cw(c16.557,58.687) 17.17,58.687 cw(c17.783,58.687) v1@17.35,59.12
PWM6: Q20.1 R39.1 R39.2 U1.40 | length 119.5
  Top Layer w0.254: v1@12.89,59.12 cw(c12.457,58.687) 13.07,58.687 cw(c13.683,58.687) v1@13.25,59.12 ; R39.2@13.07,57.906 v1(13.07,59.3) ; R39.1@13.47,55.7 14.97,54.2 19.367,54.2 19.747,53.82 U1.40@19.747,52.344 ; v1@41.194,20.868 41.194,20.194 40.5,19.5 40.5,16.575 40.775,16.3 43.7,16.3 44.111,15.889 Q20.1@44.111,13.185 ; v1@41.014,20.744 cw(c40.581,20.311) 41.194,20.311 ; v1@41.014,20.744 cw(c40.581,20.311) 41.194,20.311 ; v1@41.014,20.744 cw(c40.581,20.311) 41.194,20.311 ; 41.194,20.311 cw(c41.807,20.311) v1@41.374,20.744 ; 41.194,20.311 cw(c41.807,20.311) v1@41.374,20.744 ; 41.194,20.311 cw(c41.807,20.311) v1@41.374,20.744
  MidLayer1 w0.254: v1(4.7,23.4) 5.4,23.4 5.6,23.2 5.6,22.2 5.2,21.8 5.2,17.8 8.312,14.688 35.701,14.688 41.194,20.181 v1(41.194,20.924) ; v1@4.88,23.22 cw(c5.313,22.787) 5.313,23.4 cw(c5.313,24.013) v1@4.88,23.58 ; v1@41.014,20.744 cw(c40.581,20.311) 41.194,20.311 ; v1@41.014,20.744 cw(c40.581,20.311) 41.194,20.311 ; v1@41.014,20.744 cw(c40.581,20.311) 41.194,20.311 ; 41.194,20.311 cw(c41.807,20.311) v1@41.374,20.744 ; 41.194,20.311 cw(c41.807,20.311) v1@41.374,20.744 ; 41.194,20.311 cw(c41.807,20.311) v1@41.374,20.744
  Bottom Layer w0.254: v1@4.52,23.22 ccw(c4.087,22.787) 4.087,23.4 ccw(c4.087,24.013) v1@4.52,23.58 ; v1(4.7,23.4) 3.9,23.4 3.1,24.2 3.1,28 2.2,28.9 2.2,32.4 4.011,34.211 4.011,50.241 v1(13.07,59.3) ; v1@12.816,59.3 cw(c12.203,59.3) 12.636,58.866 cw(c13.07,58.433) v1@13.07,59.046
PWM7: Q19.1 R38.1 R38.2 U1.15 | length 154.2
  Top Layer w0.254: v1@10.89,59.12 cw(c10.457,58.687) 11.07,58.687 cw(c11.683,58.687) v1@11.25,59.12 ; v1(11.07,54.5) R38.1@11.07,55.918 ; R38.2@11.07,57.874 v1(11.07,59.3) ; v4(26.451,45.819) U1.15@28.272,45.819 ; v4@26.631,45.639 cw(c27.064,45.206) 27.064,45.819 cw(c27.064,46.432) v4@26.631,45.999 ; v1(41.2,22.3) 42.4,22.3 42.738,21.962 Q19.1@42.738,21.177 ; v1@10.89,54.68 ccw(c10.457,55.113) 11.07,55.113 ; v1@10.89,54.68 ccw(c10.457,55.113) 11.07,55.113 ; v1@10.89,54.68 ccw(c10.457,55.113) 11.07,55.113 ; v1@10.89,54.68 ccw(c10.457,55.113) 11.07,55.113 ; v1@10.89,54.68 ccw(c10.457,55.113) 11.07,55.113 ; 11.07,55.113 ccw(c11.683,55.113) v1@11.25,54.68 ; 11.07,55.113 ccw(c11.683,55.113) v1@11.25,54.68 ; 11.07,55.113 ccw(c11.683,55.113) v1@11.25,54.68 ; 11.07,55.113 ccw(c11.683,55.113) v1@11.25,54.68 ; 11.07,55.113 ccw(c11.683,55.113) v1@11.25,54.68 ; v1@41.38,22.12 cw(c41.813,21.687) 41.813,22.3 ; v1@41.38,22.12 cw(c41.813,21.687) 41.813,22.3 ; v1@41.38,22.12 cw(c41.813,21.687) 41.813,22.3 ; v1@41.38,22.48 ccw(c41.813,22.913) 41.813,22.3 ; v1@41.38,22.48 ccw(c41.813,22.913) 41.813,22.3 ; v1@41.38,22.48 ccw(c41.813,22.913) 41.813,22.3
  MidLayer1 w0.254: v1@4.52,22.22 cw(c4.087,21.787) 4.7,21.787 cw(c5.313,21.787) v1@4.88,22.22 ; v1(4.7,22.4) 4.7,17.6 8.088,14.212 35.987,14.212 42.2,20.425 42.2,21.3 v1(41.2,22.3) ; v1(11.07,54.5) 10.1,54.5 6.911,51.311 6.911,45.828 8.301,44.438 9.444,44.438 13.406,48.4 25.167,48.4 26.451,47.116 v4(26.451,45.819) ; v4@26.271,45.999 ccw(c25.838,46.432) 26.451,46.432 ccw(c27.064,46.432) v4@26.631,45.999 ; 10.457,54.5 cw(c10.457,53.887) v1@10.89,54.32 ; 10.457,54.5 ccw(c10.457,55.113) v1@10.89,54.68 ; 10.457,54.5 cw(c10.457,53.887) v1@10.89,54.32 ; 10.457,54.5 ccw(c10.457,55.113) v1@10.89,54.68 ; 10.457,54.5 cw(c10.457,53.887) v1@10.89,54.32 ; 10.457,54.5 ccw(c10.457,55.113) v1@10.89,54.68 ; 10.457,54.5 cw(c10.457,53.887) v1@10.89,54.32 ; 10.457,54.5 ccw(c10.457,55.113) v1@10.89,54.68 ; 10.457,54.5 cw(c10.457,53.887) v1@10.89,54.32 ; 10.457,54.5 ccw(c10.457,55.113) v1@10.89,54.68 ; v1@41.2,22.046 cw(c41.2,21.433) 41.634,21.866 ; v1@41.2,22.046 cw(c41.2,21.433) 41.634,21.866 ; v1@41.2,22.046 cw(c41.2,21.433) 41.634,21.866 ; v1@41.454,22.3 ccw(c42.067,22.3) 41.634,21.866 ; v1@41.454,22.3 ccw(c42.067,22.3) 41.634,21.866 ; v1@41.454,22.3 ccw(c42.067,22.3) 41.634,21.866
  Bottom Layer w0.254: v1@4.52,22.22 ccw(c4.087,21.787) 4.087,22.4 ccw(c4.087,23.013) v1@4.52,22.58 ; v1(4.7,22.4) 3.5,22.4 2.6,23.3 2.6,27.8 1.7,28.7 1.7,32.6 3.5,34.4 3.5,50.415 11.07,57.985 v1(11.07,59.3) ; v1@10.89,59.12 cw(c10.457,58.687) 11.07,58.687 cw(c11.683,58.687) v1@11.25,59.12
PWM8: Q17.1 R40.1 R40.2 U1.39 | length 123.5
  Top Layer w0.254: v1@14.89,59.12 cw(c14.457,58.687) 15.07,58.687 cw(c15.683,58.687) v1@15.25,59.12 ; R40.2@15.07,57.938 v1(15.07,59.3) ; R40.1@15.37,55.9 16.47,54.8 19.529,54.8 20.247,54.082 U1.39@20.247,52.344 ; v1(39.6,20.9) 39.6,20.1 39.1,19.6 39.1,13.5 40.674,11.926 42.574,11.926 44,10.5 Q17.1@44,8 ; v1@39.42,20.72 cw(c38.987,20.287) 39.6,20.287 ; v1@39.42,20.72 cw(c38.987,20.287) 39.6,20.287 ; v1@39.42,20.72 cw(c38.987,20.287) 39.6,20.287 ; 39.6,20.287 cw(c40.213,20.287) v1@39.78,20.72 ; 39.6,20.287 cw(c40.213,20.287) v1@39.78,20.72 ; 39.6,20.287 cw(c40.213,20.287) v1@39.78,20.72
  MidLayer1 w0.254: v1(4.7,24.4) 6.1,24.4 6.3,24.2 6.3,22.174 5.711,21.585 5.711,17.989 8.504,15.196 35.447,15.196 39.6,19.349 v1(39.6,20.9) ; v1@4.88,24.22 cw(c5.313,23.787) 5.313,24.4 cw(c5.313,25.013) v1@4.88,24.58 ; v1@39.42,20.72 cw(c38.987,20.287) 39.6,20.287 ; v1@39.42,20.72 cw(c38.987,20.287) 39.6,20.287 ; v1@39.42,20.72 cw(c38.987,20.287) 39.6,20.287 ; 39.6,20.287 cw(c40.213,20.287) v1@39.78,20.72 ; 39.6,20.287 cw(c40.213,20.287) v1@39.78,20.72 ; 39.6,20.287 cw(c40.213,20.287) v1@39.78,20.72
  Bottom Layer w0.254: v1@4.52,24.22 ccw(c4.087,23.787) 4.087,24.4 ccw(c4.087,25.013) v1@4.52,24.58 ; v1(4.7,24.4) 4,24.4 3.631,24.769 3.631,28.165 2.7,29.096 2.7,32.2 4.5,34 4.5,49.974 12.826,58.3 14.77,58.3 15.07,58.6 v1(15.07,59.3) ; v1@14.89,59.12 cw(c14.457,58.687) 15.07,58.687 cw(c15.683,58.687) v1@15.25,59.12
PWM9: Q13.1 R25.1 R25.2 U1.5 | length 20.8
  Top Layer w0.254: U1.5@28.272,40.819 29.192,40.819 30.018,39.993 36.407,39.993 39,37.4 40.3,37.4 41.575,36.125 R25.2@41.575,35.675 ; R25.1@41.575,33.963 41.575,31.725 42.5,30.8 42.5,29.543 Q13.1@42.738,29.305
PWM10: R46.2 U1.23 | length 12.5
  Top Layer w0.254: U1.23@28.272,49.819 31.97,49.819 33.574,51.423 38.777,51.423 39.116,51.084 R46.2@39.116,50.226
PWM11: R45.2 U1.18 | length 10.8
  Top Layer w0.254: U1.18@28.272,47.319 30.264,47.319 33.479,50.534 37.064,50.534 R45.2@37.511,50.087
PWM12: R43.2 U1.1 | length 41.8
  Top Layer w0.254: v4(20.747,42.787) 21.534,42 23.6,42 26.1,39.5 26.701,39.5 27.382,38.819 U1.1@28.272,38.819 ; R43.2@32.939,44.499 v1(32.939,45.581) ; 21.181,42.353 cw(c21.614,42.787) 21.001,42.787 ccw(c21.614,42.787) 21.181,42.353 ; 21.181,42.353 ccw(c20.747,41.92) 20.747,42.533 cw(c20.747,41.92) 21.181,42.353 ; v1@32.759,45.401 cw(c32.326,44.968) R43.2@32.939,44.968 ; v1@32.759,45.401 cw(c32.326,44.968) R43.2@32.939,44.968 ; v1@32.759,45.401 cw(c32.326,44.968) R43.2@32.939,44.968 ; v1@32.759,45.401 cw(c32.326,44.968) R43.2@32.939,44.968 ; v1@32.759,45.401 cw(c32.326,44.968) R43.2@32.939,44.968 ; R43.2@32.939,44.968 cw(c33.552,44.968) v1@33.119,45.401 ; R43.2@32.939,44.968 cw(c33.552,44.968) v1@33.119,45.401 ; R43.2@32.939,44.968 cw(c33.552,44.968) v1@33.119,45.401 ; R43.2@32.939,44.968 cw(c33.552,44.968) v1@33.119,45.401 ; R43.2@32.939,44.968 cw(c33.552,44.968) v1@33.119,45.401
  MidLayer1 w0.254: v4(20.747,42.787) 22.779,42.787 24.049,41.517 26.716,41.517 27.859,42.66 27.859,43.959 29.481,45.581 v1(32.939,45.581) ; v4@20.927,42.607 cw(c21.36,42.174) 21.36,42.787 ; v4@20.927,42.607 cw(c21.36,42.174) 21.36,42.787 ; v4@20.927,42.607 cw(c21.36,42.174) 21.36,42.787 ; v4@20.927,42.607 cw(c21.36,42.174) 21.36,42.787 ; v4@20.927,42.607 cw(c21.36,42.174) 21.36,42.787 ; v4@20.927,42.967 ccw(c21.36,43.4) 21.36,42.787 ; v4@20.927,42.967 ccw(c21.36,43.4) 21.36,42.787 ; v4@20.927,42.967 ccw(c21.36,43.4) 21.36,42.787 ; v4@20.927,42.967 ccw(c21.36,43.4) 21.36,42.787 ; v4@20.927,42.967 ccw(c21.36,43.4) 21.36,42.787 ; 32.326,45.581 cw(c32.326,44.968) v1@32.759,45.401 ; 32.326,45.581 ccw(c32.326,46.194) v1@32.759,45.761 ; 32.326,45.581 cw(c32.326,44.968) v1@32.759,45.401 ; 32.326,45.581 ccw(c32.326,46.194) v1@32.759,45.761 ; 32.326,45.581 cw(c32.326,44.968) v1@32.759,45.401 ; 32.326,45.581 ccw(c32.326,46.194) v1@32.759,45.761 ; 32.326,45.581 cw(c32.326,44.968) v1@32.759,45.401 ; 32.326,45.581 ccw(c32.326,46.194) v1@32.759,45.761 ; 32.326,45.581 cw(c32.326,44.968) v1@32.759,45.401 ; 32.326,45.581 ccw(c32.326,46.194) v1@32.759,45.761
PWM13: R44.2 U1.26 | length 48.2
  Top Layer w0.254: v1(22.906,43.549) 22.271,43.549 22.017,43.803 22.017,46.597 26.747,51.327 U1.26@26.747,52.344 ; R44.2@34.971,44.499 v1(34.971,45.581) ; 22.293,43.549 cw(c22.293,42.936) v1@22.726,43.369 ; 22.293,43.549 ccw(c22.293,44.162) v1@22.726,43.729 ; 22.293,43.549 cw(c22.293,42.936) v1@22.726,43.369 ; 22.293,43.549 ccw(c22.293,44.162) v1@22.726,43.729 ; 22.293,43.549 cw(c22.293,42.936) v1@22.726,43.369 ; 22.293,43.549 ccw(c22.293,44.162) v1@22.726,43.729 ; 22.293,43.549 cw(c22.293,42.936) v1@22.726,43.369 ; 22.293,43.549 ccw(c22.293,44.162) v1@22.726,43.729 ; 22.293,43.549 cw(c22.293,42.936) v1@22.726,43.369 ; 22.293,43.549 ccw(c22.293,44.162) v1@22.726,43.729 ; v1@34.791,45.401 cw(c34.358,44.968) R44.2@34.971,44.968 ; v1@34.791,45.401 cw(c34.358,44.968) R44.2@34.971,44.968 ; v1@34.791,45.401 cw(c34.358,44.968) R44.2@34.971,44.968 ; v1@34.791,45.401 cw(c34.358,44.968) R44.2@34.971,44.968 ; v1@34.791,45.401 cw(c34.358,44.968) R44.2@34.971,44.968 ; R44.2@34.971,44.968 cw(c35.584,44.968) v1@35.151,45.401 ; R44.2@34.971,44.968 cw(c35.584,44.968) v1@35.151,45.401 ; R44.2@34.971,44.968 cw(c35.584,44.968) v1@35.151,45.401 ; R44.2@34.971,44.968 cw(c35.584,44.968) v1@35.151,45.401 ; R44.2@34.971,44.968 cw(c35.584,44.968) v1@35.151,45.401
  MidLayer1 w0.254: v1(22.906,43.549) 24.43,42.025 26.462,42.025 27.351,42.914 27.351,44.251 29.824,46.724 34.59,46.724 34.971,46.343 v1(34.971,45.581) ; v1@22.906,43.295 cw(c22.906,42.682) 23.34,43.115 ; v1@22.906,43.295 cw(c22.906,42.682) 23.34,43.115 ; v1@22.906,43.295 cw(c22.906,42.682) 23.34,43.115 ; v1@22.906,43.295 cw(c22.906,42.682) 23.34,43.115 ; v1@22.906,43.295 cw(c22.906,42.682) 23.34,43.115 ; v1@23.16,43.549 ccw(c23.773,43.549) 23.34,43.115 ; v1@23.16,43.549 ccw(c23.773,43.549) 23.34,43.115 ; v1@23.16,43.549 ccw(c23.773,43.549) 23.34,43.115 ; v1@23.16,43.549 ccw(c23.773,43.549) 23.34,43.115 ; v1@23.16,43.549 ccw(c23.773,43.549) 23.34,43.115 ; v1@34.791,45.761 ccw(c34.358,46.194) 34.971,46.194 ; v1@34.791,45.761 ccw(c34.358,46.194) 34.971,46.194 ; v1@34.791,45.761 ccw(c34.358,46.194) 34.971,46.194 ; v1@34.791,45.761 ccw(c34.358,46.194) 34.971,46.194 ; v1@34.791,45.761 ccw(c34.358,46.194) 34.971,46.194 ; 34.971,46.194 ccw(c35.584,46.194) v1@35.151,45.761 ; 34.971,46.194 ccw(c35.584,46.194) v1@35.151,45.761 ; 34.971,46.194 ccw(c35.584,46.194) v1@35.151,45.761 ; 34.971,46.194 ccw(c35.584,46.194) v1@35.151,45.761 ; 34.971,46.194 ccw(c35.584,46.194) v1@35.151,45.761
PWM14: 
PWM15: 
RST: C25.2 J1.5 R42.2 U1.30 | length 95.2
  Top Layer w0.254: v1@2.52,40.92 cw(c2.087,40.487) 2.7,40.487 cw(c3.313,40.487) v1@2.88,40.92 ; J1.5@2.67,12.1 v1(2.67,13.2) ; v1(2.7,41.1) 2.7,38.3 3.136,37.864 C25.2@3.136,35.052 ; C25.2@3.136,34.735 3.439,34.735 4.443,33.731 R42.2@6.399,33.731 ; v1@6.62,34.32 cw(c6.187,33.887) 6.8,33.887 cw(c7.413,33.887) v1@6.98,34.32 ; R42.2@6.8,33.6 v1(6.8,34.5) ; v1(20.747,43.93) 21.509,44.692 21.509,46.851 24.747,50.089 U1.30@24.747,52.344 ; v1@2.49,13.02 cw(c2.057,12.587) J1.5@2.67,12.587 ; v1@2.49,13.02 cw(c2.057,12.587) J1.5@2.67,12.587 ; v1@2.49,13.02 cw(c2.057,12.587) J1.5@2.67,12.587 ; v1@2.49,13.02 cw(c2.057,12.587) J1.5@2.67,12.587 ; v1@2.49,13.02 cw(c2.057,12.587) J1.5@2.67,12.587 ; J1.5@2.67,12.587 cw(c3.283,12.587) v1@2.85,13.02 ; J1.5@2.67,12.587 cw(c3.283,12.587) v1@2.85,13.02 ; J1.5@2.67,12.587 cw(c3.283,12.587) v1@2.85,13.02 ; J1.5@2.67,12.587 cw(c3.283,12.587) v1@2.85,13.02 ; J1.5@2.67,12.587 cw(c3.283,12.587) v1@2.85,13.02 ; v1@20.747,44.184 ccw(c20.747,44.797) 21.181,44.364 ; v1@20.747,44.184 ccw(c20.747,44.797) 21.181,44.364 ; v1@20.747,44.184 ccw(c20.747,44.797) 21.181,44.364 ; v1@20.747,44.184 ccw(c20.747,44.797) 21.181,44.364 ; v1@20.747,44.184 ccw(c20.747,44.797) 21.181,44.364 ; v1@21.001,43.93 cw(c21.614,43.93) 21.181,44.364 ; v1@21.001,43.93 cw(c21.614,43.93) 21.181,44.364 ; v1@21.001,43.93 cw(c21.614,43.93) 21.181,44.364 ; v1@21.001,43.93 cw(c21.614,43.93) 21.181,44.364 ; v1@21.001,43.93 cw(c21.614,43.93) 21.181,44.364
  MidLayer1 w0.254: v1@2.52,40.92 ccw(c2.087,40.487) 2.087,41.1 ccw(c2.087,41.713) v1@2.52,41.28 ; v1(2.67,13.2) 2.07,13.2 ; v1(2.7,41.1) 1.9,41.1 1.4,40.6 1.4,32.2 3,30.6 3,27.7 1.9,26.6 1.9,13.37 2.07,13.2 ; v1@6.62,34.68 ccw(c6.187,35.113) 6.8,35.113 ccw(c7.413,35.113) v1@6.98,34.68 ; v1(6.8,34.5) 6.8,37.109 13.875,44.184 19.731,44.184 19.985,43.93 v1(20.747,43.93) ; 2.07,13.2 cw(c2.07,12.618) v1@2.488,13.023 ; 2.07,13.2 ccw(c2.07,13.782) v1@2.488,13.377 ; 2.07,13.2 cw(c2.07,12.618) v1@2.488,13.023 ; 2.07,13.2 ccw(c2.07,13.782) v1@2.488,13.377 ; 2.07,13.2 cw(c2.07,12.618) v1@2.488,13.023 ; 2.07,13.2 ccw(c2.07,13.782) v1@2.488,13.377 ; 2.07,13.2 cw(c2.07,12.618) v1@2.488,13.023 ; 2.07,13.2 ccw(c2.07,13.782) v1@2.488,13.377 ; 2.07,13.2 cw(c2.07,12.618) v1@2.488,13.023 ; 2.07,13.2 ccw(c2.07,13.782) v1@2.488,13.377 ; 20.134,43.93 cw(c20.134,43.317) v1@20.567,43.75 ; 20.134,43.93 ccw(c20.134,44.543) v1@20.567,44.11 ; 20.134,43.93 cw(c20.134,43.317) v1@20.567,43.75 ; 20.134,43.93 ccw(c20.134,44.543) v1@20.567,44.11 ; 20.134,43.93 cw(c20.134,43.317) v1@20.567,43.75 ; 20.134,43.93 ccw(c20.134,44.543) v1@20.567,44.11 ; 20.134,43.93 cw(c20.134,43.317) v1@20.567,43.75 ; 20.134,43.93 ccw(c20.134,44.543) v1@20.567,44.11 ; 20.134,43.93 cw(c20.134,43.317) v1@20.567,43.75 ; 20.134,43.93 ccw(c20.134,44.543) v1@20.567,44.11
SCK: J1.3 R32.1 R32.2 U1.20 U2.13 | length 92.3
  Top Layer w0.254: J1.3@4.09,14.5 2.9,14.5 1.9,15.5 1.9,25.4 5.4,28.9 v1(6.6,28.9) ; J1.3@5.27,14.5 6.32,13.45 6.32,10.3 7.034,9.586 R32.1@9.066,9.586 ; v1@6.42,28.72 ccw(c5.987,28.287) 5.987,28.9 ccw(c5.987,29.513) v1@6.42,29.08 ; R32.2@9.066,7.686 9.066,6.704 11.337,4.433 20.879,4.433 23.558,7.112 26.958,7.112 27.974,6.096 U2.13@27.974,4.34 ; v1@24.277,45.28 ccw(c23.844,45.713) 24.457,45.713 ccw(c25.07,45.713) v1@24.637,45.28 ; v1(24.457,45.1) 24.457,46.751 26.025,48.319 U1.20@28.272,48.319
  MidLayer1 w0.254: v1@6.42,29.08 ccw(c5.987,29.513) 6.6,29.513 ccw(c7.213,29.513) v1@6.78,29.08 ; v1(6.6,28.9) 6.6,31.396 5.555,32.441 5.555,37.255 14.585,46.285 20.932,46.285 22.117,45.1 v1(24.457,45.1) ; v1@24.277,44.92 ccw(c23.844,44.487) 23.844,45.1 ccw(c23.844,45.713) v1@24.277,45.28
Thermistor: R68.1 R69.2 U1.86 | length 21.3
  Top Layer w0.254: U1.86@19.747,37.294 19.747,36.199 ; v1@19.384,35.707 ccw(c19.197,35.98) 19.528,35.98 ; v1@19.384,35.707 ccw(c19.197,35.98) 19.528,35.98 ; v1@19.384,35.707 ccw(c19.197,35.98) 19.528,35.98 ; v1@19.384,35.707 ccw(c19.197,35.98) 19.528,35.98 ; v1@19.384,35.707 ccw(c19.197,35.98) 19.528,35.98 ; v1(19.528,35.497) cw(c19.815,35.737) 19.55,36.002 ; v1(19.528,35.497) cw(c19.815,35.737) 19.55,36.002 ; v1(19.528,35.497) cw(c19.815,35.737) 19.55,36.002 ; v1(19.528,35.497) cw(c19.815,35.737) 19.55,36.002 ; v1(19.528,35.497) cw(c19.815,35.737) 19.55,36.002 ; v1(19.528,35.497) 19.528,35.98 ; 19.528,35.98 ccw(c19.859,35.98) v1@19.671,35.707 ; 19.528,35.98 ccw(c19.859,35.98) v1@19.671,35.707 ; 19.528,35.98 ccw(c19.859,35.98) v1@19.671,35.707 ; 19.528,35.98 ccw(c19.859,35.98) v1@19.671,35.707 ; 19.528,35.98 ccw(c19.859,35.98) v1@19.671,35.707 ; 19.528,35.98 19.747,36.199 ; v1@19.723,35.66 cw(c20.03,35.916) 19.747,36.199 ; v1@19.723,35.66 cw(c20.03,35.916) 19.747,36.199 ; v1@19.723,35.66 cw(c20.03,35.916) 19.747,36.199 ; v1@19.723,35.66 cw(c20.03,35.916) 19.747,36.199 ; v1@19.723,35.66 cw(c20.03,35.916) 19.747,36.199
  Bottom Layer w0.254: v1(19.528,35.497) 20.798,35.497 21.255,35.04 R68.1@21.255,33.831 ; R68.1@20.747,33.831 R69.2@23.287,33.831 ; v1@19.707,35.318 cw(c20.141,34.884) 20.141,35.497 ; v1@19.707,35.318 cw(c20.141,34.884) 20.141,35.497 ; v1@19.707,35.318 cw(c20.141,34.884) 20.141,35.497 ; v1@19.707,35.318 cw(c20.141,34.884) 20.141,35.497 ; v1@19.707,35.318 cw(c20.141,34.884) 20.141,35.497 ; v1@19.707,35.677 ccw(c20.141,36.111) 20.141,35.497 ; v1@19.707,35.677 ccw(c20.141,36.111) 20.141,35.497 ; v1@19.707,35.677 ccw(c20.141,36.111) 20.141,35.497 ; v1@19.707,35.677 ccw(c20.141,36.111) 20.141,35.497 ; v1@19.707,35.677 ccw(c20.141,36.111) 20.141,35.497
TX0_RTS: R37.1 R37.2 U1.76 U2.4 | length 84.4
  Top Layer w0.254: v4(9.063,29.325) 11.645,29.325 12.9,28.07 12.9,19.5 13.911,18.489 13.911,13.047 15.708,11.25 17.745,11.25 19.145,9.85 R37.1@19.47,9.85 ; U1.76@14.747,37.294 14.747,40.47 15.413,41.136 v1(16.683,41.136) ; R37.2@19.02,7.547 20.437,7.547 22.657,9.767 29.256,9.767 30.514,11.025 U2.4@30.514,13.44 ; v4@9.243,29.145 cw(c9.676,28.712) 9.676,29.325 ; v4@9.243,29.145 cw(c9.676,28.712) 9.676,29.325 ; v4@9.243,29.145 cw(c9.676,28.712) 9.676,29.325 ; v4@9.243,29.145 cw(c9.676,28.712) 9.676,29.325 ; v4@9.243,29.145 cw(c9.676,28.712) 9.676,29.325 ; v4@9.243,29.505 ccw(c9.676,29.938) 9.676,29.325 ; v4@9.243,29.505 ccw(c9.676,29.938) 9.676,29.325 ; v4@9.243,29.505 ccw(c9.676,29.938) 9.676,29.325 ; v4@9.243,29.505 ccw(c9.676,29.938) 9.676,29.325 ; v4@9.243,29.505 ccw(c9.676,29.938) 9.676,29.325 ; 16.07,41.136 ccw(c16.07,41.749) v1@16.503,41.316 ; 16.07,41.136 ccw(c16.07,41.749) v1@16.503,41.316 ; 16.07,41.136 ccw(c16.07,41.749) v1@16.503,41.316 ; 16.07,41.136 ccw(c16.07,41.749) v1@16.503,41.316 ; 16.07,41.136 ccw(c16.07,41.749) v1@16.503,41.316 ; 16.07,41.136 cw(c16.07,40.523) v1@16.503,40.956 ; 16.07,41.136 cw(c16.07,40.523) v1@16.503,40.956 ; 16.07,41.136 cw(c16.07,40.523) v1@16.503,40.956 ; 16.07,41.136 cw(c16.07,40.523) v1@16.503,40.956 ; 16.07,41.136 cw(c16.07,40.523) v1@16.503,40.956
  MidLayer1 w0.254: v4(9.063,29.325) 12.492,29.325 14.862,31.695 14.862,40.662 15.336,41.136 v1(16.683,41.136) ; v4@9.243,29.145 cw(c9.676,28.712) 9.676,29.325 ; v4@9.243,29.145 cw(c9.676,28.712) 9.676,29.325 ; v4@9.243,29.145 cw(c9.676,28.712) 9.676,29.325 ; v4@9.243,29.145 cw(c9.676,28.712) 9.676,29.325 ; v4@9.243,29.145 cw(c9.676,28.712) 9.676,29.325 ; v4@9.243,29.505 ccw(c9.676,29.938) 9.676,29.325 ; v4@9.243,29.505 ccw(c9.676,29.938) 9.676,29.325 ; v4@9.243,29.505 ccw(c9.676,29.938) 9.676,29.325 ; v4@9.243,29.505 ccw(c9.676,29.938) 9.676,29.325 ; v4@9.243,29.505 ccw(c9.676,29.938) 9.676,29.325 ; 16.07,41.136 ccw(c16.07,41.749) v1@16.503,41.316 ; 16.07,41.136 ccw(c16.07,41.749) v1@16.503,41.316 ; 16.07,41.136 ccw(c16.07,41.749) v1@16.503,41.316 ; 16.07,41.136 ccw(c16.07,41.749) v1@16.503,41.316 ; 16.07,41.136 ccw(c16.07,41.749) v1@16.503,41.316 ; 16.07,41.136 cw(c16.07,40.523) v1@16.503,40.956 ; 16.07,41.136 cw(c16.07,40.523) v1@16.503,40.956 ; 16.07,41.136 cw(c16.07,40.523) v1@16.503,40.956 ; 16.07,41.136 cw(c16.07,40.523) v1@16.503,40.956 ; 16.07,41.136 cw(c16.07,40.523) v1@16.503,40.956
TX1_RTS: U2.5
TX2_RTS: U2.6
U1_XT1: C90.2 U1.34 Y1.2 | length 9.6
  Top Layer w0.254: C90.2@19.448,56.508 Y1.2@21.548,56.508 ; U1.34@22.747,52.344 22.747,55.977 23.27,56.5 Y1.2@26.398,56.5
U1_XT2: C91.1 U1.33 Y1.1 | length 17.3
  Top Layer w0.254: U1.33@23.247,52.344 23.247,54.777 23.67,55.2 27.165,55.2 28.495,56.53 C91.1@37.348,56.53
U2_XT1: 
U2_XT2: 